# EAGLE board SPIDERADAPT (EAGLE 9.4.2)
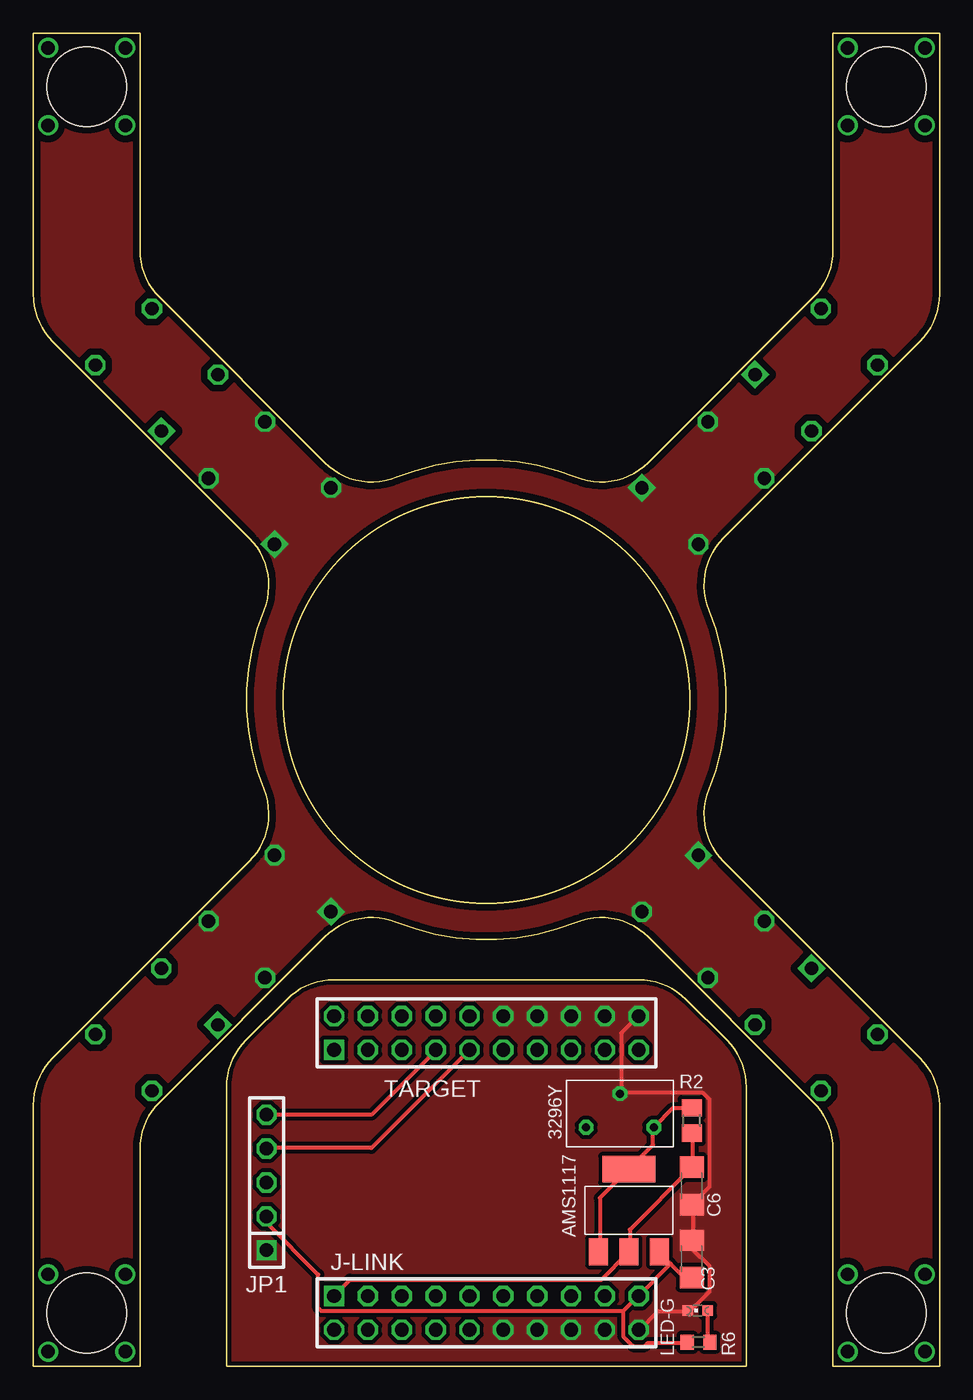
[diagram p0: board, top side]
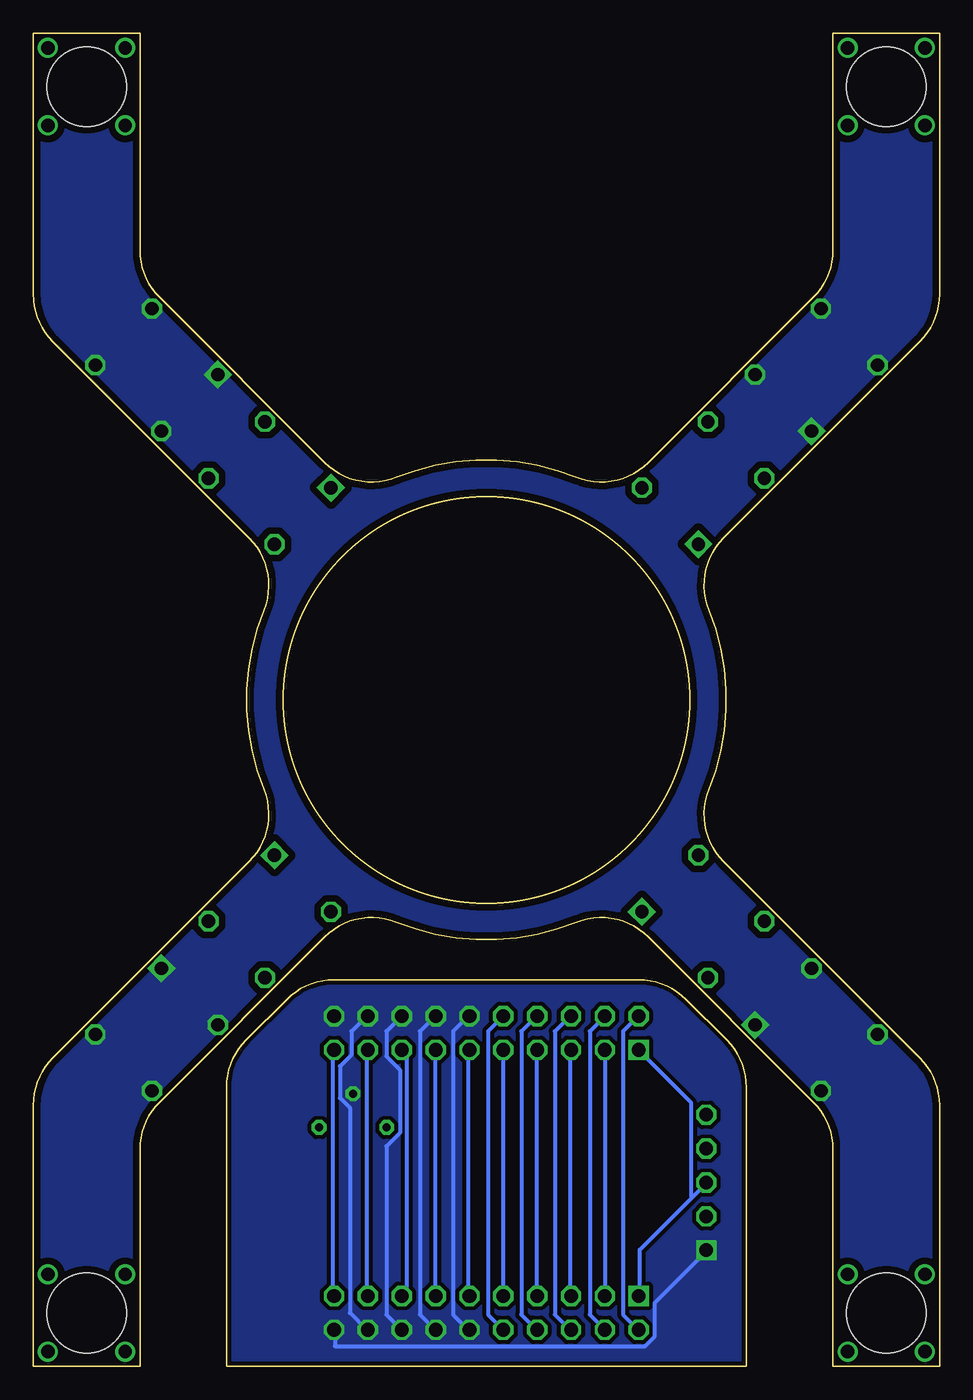
[diagram p1: board, bottom side, seen from below]

Size 68 x 100 mm. Coordinates in mm from the lower left corner, seen from the top.
Outline: 14.5,0 53.5,0 53.5,20.93 arc45 52.04,24.46 48.96,27.54 arc45 45.43,29 22.57,29 arc45 19.04,27.54 15.96,24.46 arc45 14.5,20.93 14.5,0
Outline: 0,0 8,0 8,16.27 arc-45 9.46,19.81 21.86,32.2 arc-67 27.27,33.31 arc44 40.73,33.31 arc-67 46.14,32.2 58.54,19.81 arc-45 60,16.27 60,0 68,0 68,19.59 arc45 66.54,23.12 51.8,37.86 arc-67 50.69,43.27 arc44 50.69,56.73 arc-67 51.8,62.14 66.54,76.88 arc45 68,80.41 68,100 60,100 60,83.73 arc-45 58.54,80.19 46.14,67.8 arc-67 40.73,66.69 arc44 27.27,66.69 arc-67 21.86,67.8 9.46,80.19 arc-45 8,83.73 8,100 0,100 0,80.41 arc45 1.46,76.88 16.2,62.14 arc-67 17.31,56.73 arc44 17.31,43.27 arc-67 16.2,37.86 1.46,23.12 arc45 0,19.59 0,0
Outline: circle at 34,50 radius 15.25
Copper layers (1*16): Top 0.035mm / dielectric 1.5mm / Bottom 0.035mm
Design rules "default *": minimum track width 0.25mm, minimum drill 0.35mm, track to track 0.2mm, track to pad 0.2mm, pad to pad 0.2mm, via to via 0.2mm, smd to smd 0.2mm, copper to edge 0.19mm, drill to drill 0.1mm, minimum pad ring 10mil, minimum via ring 8mil, stop-mask expansion 2mil, vias tented up to drill 0mil, thermal gap 10mil
Holes 6 mm at 4,4 64,4 64,96 4,96

## Footprints (pad centres in the part's own frame; a part is rotated, then mirrored left to right if it is on the bottom)
3296Y = drill 0.6 octagon: P$1 -2.54,-2.54; P$2 0,0; P$3 2.54,-2.54
AMS1117 = smd 4 x 2: P$1 0,3.1 | smd 1.4 x 2: P$2 -2.29,-3.1; P$3 0,-3.1; P$4 2.29,-3.1
C1206 = smd 1.6 x 1.8: 1 -1.4,0; 2 1.4,0
2X10 = drill 1.016 square: 1 -11.43,1.27 | drill 1.016 octagon: 2 -11.43,-1.27; 3 -8.89,1.27; 4 -8.89,-1.27; 5 -6.35,1.27; 6 -6.35,-1.27; 7 -3.81,1.27; 8 -3.81,-1.27; 9 -1.27,1.27; 10 -1.27,-1.27; 11 1.27,1.27; 12 1.27,-1.27; 13 3.81,1.27; 14 3.81,-1.27; 15 6.35,1.27; 16 6.35,-1.27; 17 8.89,1.27; 18 8.89,-1.27; 19 11.43,1.27; 20 11.43,-1.27
1X05 = drill 1.016 square: 1 -5.08,0 | drill 1.016 octagon: 2 -2.54,0; 3 0,0; 4 2.54,0; 5 5.08,0
CHIPLED_0603 = smd 0.8 x 0.8: A 0,-0.75; C 0,0.75
R0805 = smd 1.3 x 1.5: 1 -0.95,0; 2 0.95,0
R0603 = smd 1 x 1.1: 1 -0.85,0; 2 0.85,0
2X10' = drill 1.016 square: 1 -11.43,-1.27 | drill 1.016 octagon: 2 -11.43,1.27; 3 -8.89,-1.27; 4 -8.89,1.27; 5 -6.35,-1.27; 6 -6.35,1.27; 7 -3.81,-1.27; 8 -3.81,1.27; 9 -1.27,-1.27; 10 -1.27,1.27; 11 1.27,-1.27; 12 1.27,1.27; 13 3.81,-1.27; 14 3.81,1.27; 15 6.35,-1.27; 16 6.35,1.27; 17 8.89,-1.27; 18 8.89,1.27; 19 11.43,-1.27; 20 11.43,1.27
KCONNECT- = drill 1 pad 1.4 square: 1 -3,-3.5 | drill 1 pad 1.4 octagon: 2 -3,3.5; 3 3,-3.5; 4 3,3.5

## Placement (x,y rotation side)
3296Y  3296Y  [3296Y]  44.02,20.45 0 top
AMS1117  AMS1117  [AMS1117]  44.69,11.68 0 top
C3  10µ  [C1206]  49.4,8.05 90 top
C6  22µ  [C1206]  49.4,13.53 270 top
J-LINK  [2X10]  34,4 0 top
JP1  [1X05]  17.5,13.78 90 top
LED-G  [CHIPLED_0603]  49.86,4.17 90 top
R2  124R  [R0805]  49.4,18.43 90 top
R6  2k  [R0603]  49.92,1.8 0 top
TARGET  [2X10']  34,25 0 top
U$1  KCONNECT-  [KCONNECT-]  9.25,74.75 45 top
U$2  KCONNECT-  [KCONNECT-]  17.74,66.26 45 top
U$3  KCONNECT-  [KCONNECT-]  58.75,74.75 315 top
U$4  KCONNECT-  [KCONNECT-]  50.26,66.26 315 top
U$18  KCONNECT-  [KCONNECT-]  9.25,25.25 135 top
U$19  KCONNECT-  [KCONNECT-]  17.74,33.74 135 top
U$20  KCONNECT-  [KCONNECT-]  58.75,25.25 225 top
U$21  KCONNECT-  [KCONNECT-]  50.26,33.74 225 top

## Library data of the parts
3296Y AMS1117 J-LINK U$1-U$4 U$18-U$21 = CanCubeSat
C3 C6 = rcl; SPICEPREFIX: C
JP1 TARGET = pinheadCS
LED-G = led
R2 = rcl; SPICEPREFIX: R
R6 = resistor

## Nets
5V: AMS1117.P$4 C3.1 J-LINK.19 JP1.2 R6.1 TARGET.19
BUS+: U$1.1 U$1.2 U$1.3 U$1.4 U$3.1 U$3.2 U$3.3 U$3.4 U$18.1 U$18.2 U$18.3 U$18.4 U$20.1 U$20.2 U$20.3 U$20.4
BUS-: U$2.1 U$2.2 U$2.3 U$2.4 U$4.1 U$4.2 U$4.3 U$4.4 U$19.1 U$19.2 U$19.3 U$19.4 U$21.1 U$21.2 U$21.3 U$21.4
GND1: 3296Y.P$2 C3.2 C6.2 J-LINK.12 J-LINK.14 J-LINK.16 J-LINK.18 J-LINK.20 JP1.1 LED-G.C TARGET.12 TARGET.14 TARGET.16 TARGET.18 TARGET.20
N$2: J-LINK.3 TARGET.3
N$8: J-LINK.5 TARGET.5
N$9: J-LINK.11 TARGET.11
N$19: J-LINK.13 TARGET.13
N$20: J-LINK.15 TARGET.15
N$24: J-LINK.17 TARGET.17
N$25: J-LINK.10 TARGET.10
N$28: J-LINK.8 TARGET.8
N$31: J-LINK.6 TARGET.6
N$32: J-LINK.4 TARGET.4
N$33: J-LINK.2 TARGET.2
N$34: 3296Y.P$3 AMS1117.P$1 AMS1117.P$2 R2.2
N$38: LED-G.A R6.2
TCK: J-LINK.9 JP1.4 TARGET.9
TMS: J-LINK.7 JP1.5 TARGET.7
VDD: AMS1117.P$3 C6.1 J-LINK.1 JP1.3 R2.1 TARGET.1

## Tracks (layer width: path | path; a pad name or v marks a point on that pad's centre or on a via)
5V
  Top 0.3: 47.81,7.69 47,8.5 AMS1117.P$4 | 47.81,7.69 48.75,6.75 49.38,6.75 C3.1 | 44.25,4.12 44.25,2.25 45,1.5 45.88,1.5 46.12,1.75 49,1.75 R6.1 | 44.25,4.12 45.38,5.25 J-LINK.19 45.5,5.38 47.81,7.69 | JP1.2 17.5,10.75 21.38,6.88 21.38,4.38 21.62,4.12 44.25,4.12
  Bottom 0.3: TARGET.19 45.5,23.62 45.5,5.38 J-LINK.19
BUS+
  pour Bottom (isolate 0.5, rank 2, no thermals): 0,100 8,100 8,83.5 8.12,82.5 8.5,81.5 9.17,80.48 22.53,67.16 23.88,66.55 25.18,66.29 26.34,66.41 27.79,66.88 29.7,67.48 31.55,67.82 33.12,67.99 35.36,67.96 37.55,67.66 39.33,67.19 41.25,66.51 42.13,66.33 43.19,66.35 44.26,66.6 45.4,67.15 46.1,67.76 58.84,80.47 59.44,81.44 59.87,82.5 60,83.47 60.01,99.99 68,99.99 68,80.5 67.83,78.51 66.97,77.31 51.53,61.86 50.94,61.01 50.46,59.77 50.31,58.63 50.41,57.59 51,55.91 51.52,54.23 51.86,52.36 52,50.63 51.97,48.85 51.74,47 51.41,45.43 50.89,43.76 50.49,42.65 50.33,41.68 50.43,40.38 50.68,39.47 51.19,38.58 51.73,37.93 66.9,22.75 67.51,21.73 67.88,20.65 68.02,19.68 67.99,0.01 60,0 60,16.48 59.84,17.58 59.34,18.77 58.78,19.56 45.79,32.52 45.07,33.02 44.43,33.33 43.8,33.53 42.97,33.66 42.04,33.65 41.15,33.47 40.58,33.25 39.66,32.9 38.31,32.51 36.96,32.25 35.66,32.09 34.43,32 33.34,32 32.05,32.09 30.78,32.28 29.25,32.64 27.94,33.04 26.82,33.48 25.75,33.66 24.65,33.62 23.76,33.4 22.99,33.04 22.23,32.54 21.27,31.61 9.1,19.43 8.67,18.75 8.34,18.07 8.08,17.07 8,16.38 8,0 0.02,-0.01 0,19.48 0.08,20.58 0.44,21.63 0.94,22.52 1.61,23.27 3.12,24.76 16.43,38.08 16.83,38.62 17.21,39.29 17.5,40.06 17.65,40.98 17.66,41.88 17.51,42.75 17.11,43.76 16.53,45.69 16.23,47.15 16.04,48.76 16,50.51 16.12,52.02 16.32,53.4 16.53,54.35 16.86,55.49 17.25,56.59 17.55,57.42 17.69,58.7 17.49,59.93 17.16,60.8 16.75,61.51 16.22,62.13 1.26,77.1 0.53,78.16 0.1,79.27 -0.01,80.91
BUS-
  pour Top (isolate 0.5, rank 2, no thermals): 0,100 8,100 8,83.5 8.12,82.5 8.5,81.5 9.17,80.48 22.53,67.16 23.88,66.55 25.18,66.29 26.34,66.41 27.79,66.88 29.7,67.48 31.55,67.82 33.12,67.99 35.36,67.96 37.55,67.66 39.33,67.19 41.25,66.51 42.13,66.33 43.19,66.35 44.26,66.6 45.4,67.15 46.1,67.76 58.84,80.47 59.44,81.44 59.87,82.5 60,83.47 60.01,99.99 68,99.99 68,80.5 67.83,78.51 66.97,77.31 51.53,61.86 50.94,61.01 50.46,59.77 50.31,58.63 50.41,57.59 51,55.91 51.52,54.23 51.86,52.36 52,50.63 51.97,48.85 51.74,47 51.41,45.43 50.89,43.76 50.49,42.65 50.33,41.68 50.43,40.38 50.68,39.47 51.19,38.58 51.73,37.93 66.9,22.75 67.51,21.73 67.88,20.65 68.02,19.68 67.99,0.01 60,0 60,16.48 59.84,17.58 59.34,18.77 58.78,19.56 45.79,32.52 45.07,33.02 44.43,33.33 43.8,33.53 42.97,33.66 42.04,33.65 41.15,33.47 40.58,33.25 39.66,32.9 38.31,32.51 36.96,32.25 35.66,32.09 34.43,32 33.34,32 32.05,32.09 30.78,32.28 29.25,32.64 27.94,33.04 26.82,33.48 25.75,33.66 24.65,33.62 23.76,33.4 22.99,33.04 22.23,32.54 21.27,31.61 9.1,19.43 8.67,18.75 8.34,18.07 8.08,17.07 8,16.38 8,0 0.02,-0.01 0,19.48 0.08,20.58 0.44,21.63 0.94,22.52 1.61,23.27 3.12,24.76 16.43,38.08 16.83,38.62 17.21,39.29 17.5,40.06 17.65,40.98 17.66,41.88 17.51,42.75 17.11,43.76 16.53,45.69 16.23,47.15 16.04,48.76 16,50.51 16.12,52.02 16.32,53.4 16.53,54.35 16.86,55.49 17.25,56.59 17.55,57.42 17.69,58.7 17.49,59.93 17.16,60.8 16.75,61.51 16.22,62.13 1.26,77.1 0.53,78.16 0.1,79.27 -0.01,80.91
GND1
  Top 0.3: TARGET.20 45.38,26.25 44.12,25 44.12,20.5 3296Y.P$2 44.25,20.5 50.25,20.5 50.75,20 50.75,13.5 49.5,12.25 C6.2 49.5,12.12 49.5,9.5 C3.2 49.5,9.38 49.5,8.75 50.75,7.5 50.75,5.62 49.25,4.12 LED-G.C 49,4.12 46.88,4.12 45.5,2.75 J-LINK.20
  Bottom 0.3: JP1.1 17.5,8.62 21.38,4.75 21.38,2.25 22.12,1.5 45.38,1.5 45.38,2.62 J-LINK.20 | J-LINK.18 43,2.75 44.25,4 44.25,19.38 45,20.12 45,22.5 44.12,23.38 44.12,25.12 43,26.25 TARGET.18 | J-LINK.16 40.38,2.75 41.5,3.88 41.5,16.5 40.5,17.5 40.5,22.25 41.5,23.25 41.5,25.12 40.38,26.25 TARGET.16 | J-LINK.14 37.88,2.75 39,3.88 39,25.12 37.88,26.25 TARGET.14 | J-LINK.12 35.38,2.75 36.5,3.88 36.5,25.12 35.38,26.25 TARGET.12
  pour Top (isolate 0.3, no thermals): 14.5,0 14.5,23 20.5,29 47.5,29 53.5,23 53.5,0
  pour Bottom (isolate 0.3, no thermals): 14.5,0 14.5,23 20.5,29 47.5,29 53.5,23 53.5,0
N$1  (via drill 1)
  other vias: 1.1,93.1
N$2
  Bottom 0.3: J-LINK.3 25.12,5.38 25.12,23.62 TARGET.3
N$3  (via drill 1)
  other vias: 6.9,93.1
N$4  (via drill 1)
  other vias: 1.1,6.9
N$5  (via drill 1)
  other vias: 1.1,1.1
N$6  (via drill 1)
  other vias: 6.9,1.1
N$7  (via drill 1)
  other vias: 6.9,6.9
N$8
  Bottom 0.3: J-LINK.5 27.75,5.38 27.75,23.62 TARGET.5
N$9
  Bottom 0.3: J-LINK.11 35.38,5.38 35.38,23.62 TARGET.11
N$10  (via drill 1)
  other vias: 61.1,6.9
N$11  (via drill 1)
  other vias: 61.1,1.1
N$12  (via drill 1)
  other vias: 66.9,1.1
N$13  (via drill 1)
  other vias: 66.9,6.9
N$14  (via drill 1)
  other vias: 61.1,98.9
N$15  (via drill 1)
  other vias: 61.1,93.1
N$16  (via drill 1)
  other vias: 66.9,93.1
N$17  (via drill 1)
  other vias: 66.9,98.9
N$18  (via drill 1)
  other vias: 1.1,98.9
N$19
  Bottom 0.3: J-LINK.13 37.88,5.38 37.88,23.62 TARGET.13
N$20
  Bottom 0.3: J-LINK.15 40.25,5.38 40,5.62 40,23.38 40.25,23.62 TARGET.15
N$21  (via drill 1)
  other vias: 6.9,98.9
N$24
  Bottom 0.3: J-LINK.17 43,5.38 43,23.62 TARGET.17
N$25
  Bottom 0.3: J-LINK.10 33.88,3.88 33.88,25.12 TARGET.10
N$28
  Bottom 0.3: J-LINK.8 30.25,2.75 31.38,3.88 31.38,25.12 30.25,26.25 TARGET.8
N$31
  Bottom 0.3: J-LINK.6 27.75,2.75 28.88,3.88 28.88,25.12 27.75,26.25 TARGET.6
N$32
  Bottom 0.3: J-LINK.4 25.12,2.75 26.25,3.88 26.25,25.12 25.12,26.25 TARGET.4
N$33
  Bottom 0.3: J-LINK.2 22.62,2.75 23.75,3.88 23.75,25.12 22.62,26.25 TARGET.2
N$34
  Top 0.3: R2.2 49.38,19.38 48,19.38 46.62,18 3296Y.P$3 46.5,17.88 46.5,16.62 44.75,14.88 AMS1117.P$1 44.62,14.75 42.5,12.62 42.5,8.62 AMS1117.P$2
N$38
  Top 0.3: LED-G.A 50.62,4.12 50.62,2 50.75,1.88 R6.2
TCK
  Top 0.3: TARGET.9 25.38,16.38 17.5,16.38 JP1.4
  Bottom 0.3: J-LINK.9 32.75,5.38 32.75,23.62 TARGET.9
TMS
  Top 0.3: JP1.5 17.5,18.88 25.38,18.88 30.12,23.62 TARGET.7
  Bottom 0.3: J-LINK.7 30.25,5.38 30.25,23.62 TARGET.7
VDD
  Top 0.3: R2.1 49.5,17.38 49.5,15 C6.1 49.38,14.88 44.75,10.25 44.75,8.62 AMS1117.P$3 44.62,8.5 42.62,6.5 23.75,6.5 22.62,5.38 J-LINK.1
  Bottom 0.3: 18.56,12.69 22.5,8.75 22.5,5.38 J-LINK.1 | 18.56,12.69 17.5,13.75 JP1.3 | TARGET.1 22.5,23.62 18.62,19.75 18.62,12.75 18.56,12.69